# Altium PCB LEDbars.PcbDoc
Units mm, origin at the board's own origin, x right, y up, seen from the top; angles counter-clockwise.
Board outline 38.5 x 57.75 mm, 2 copper layers (Top Layer, Bottom Layer); 31 components, 51 nets, 146 pads, 18 vias.
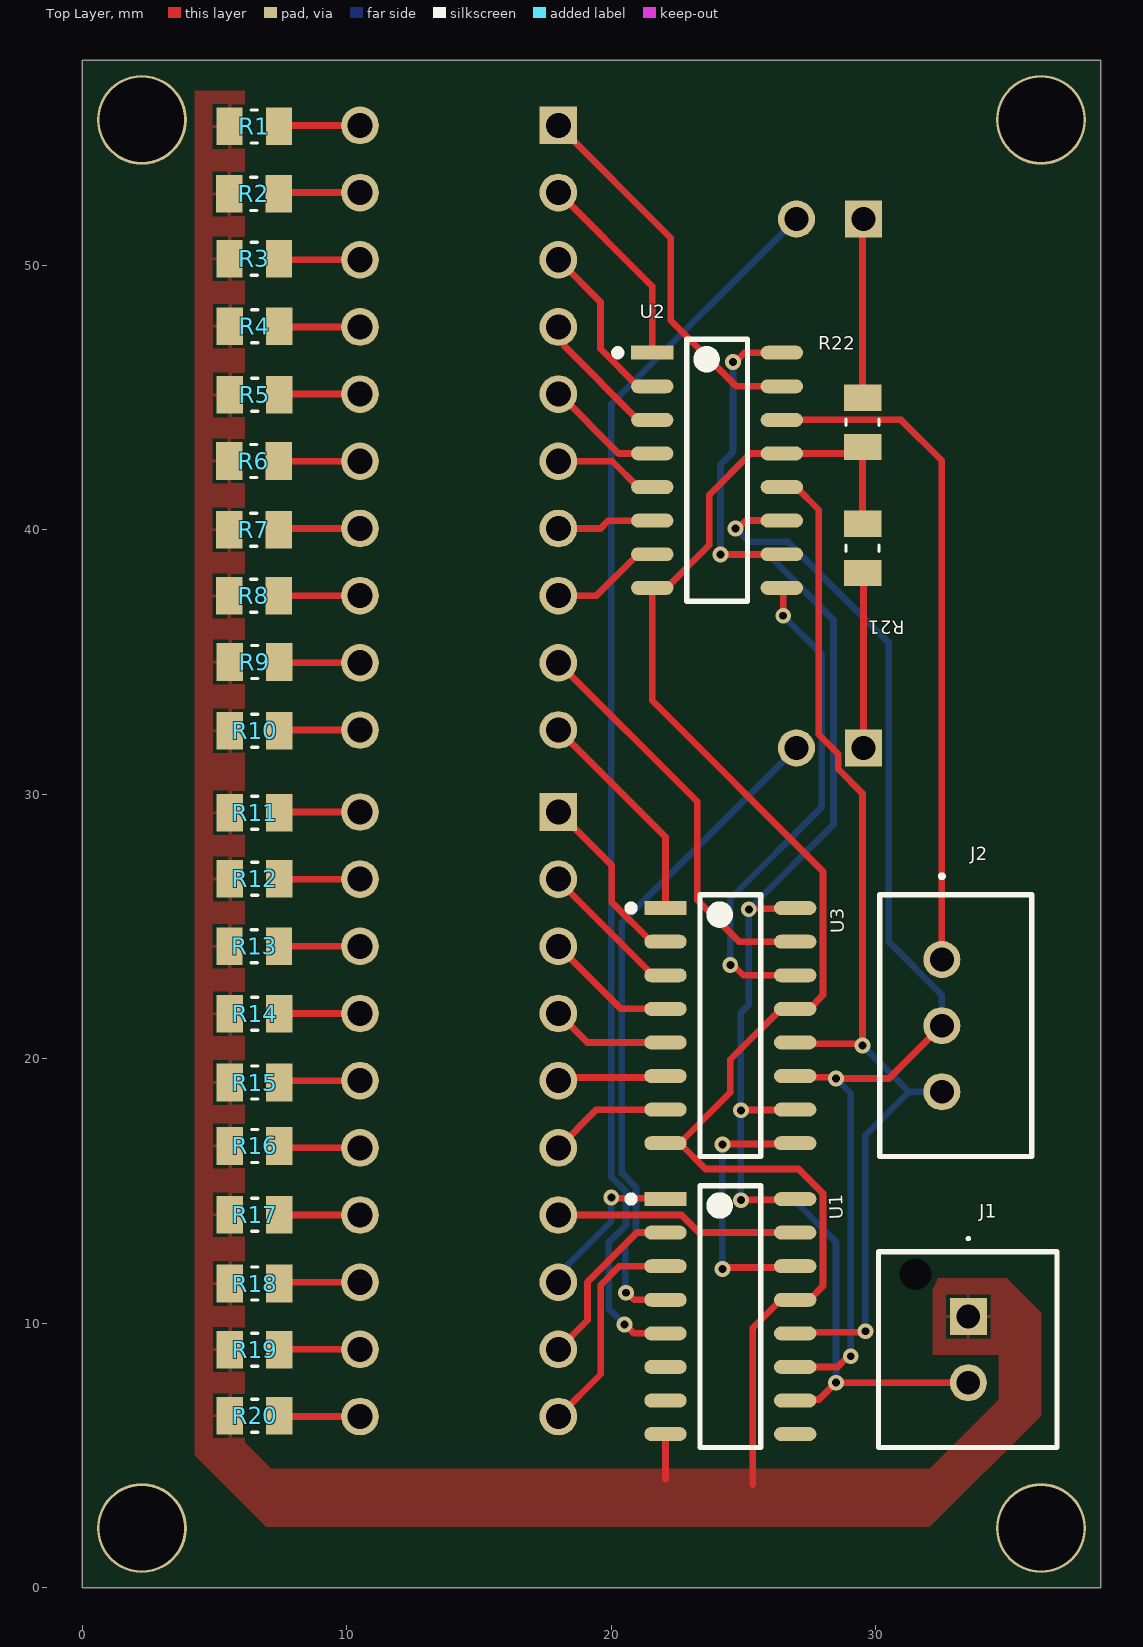
[diagram p0: Top Layer view]
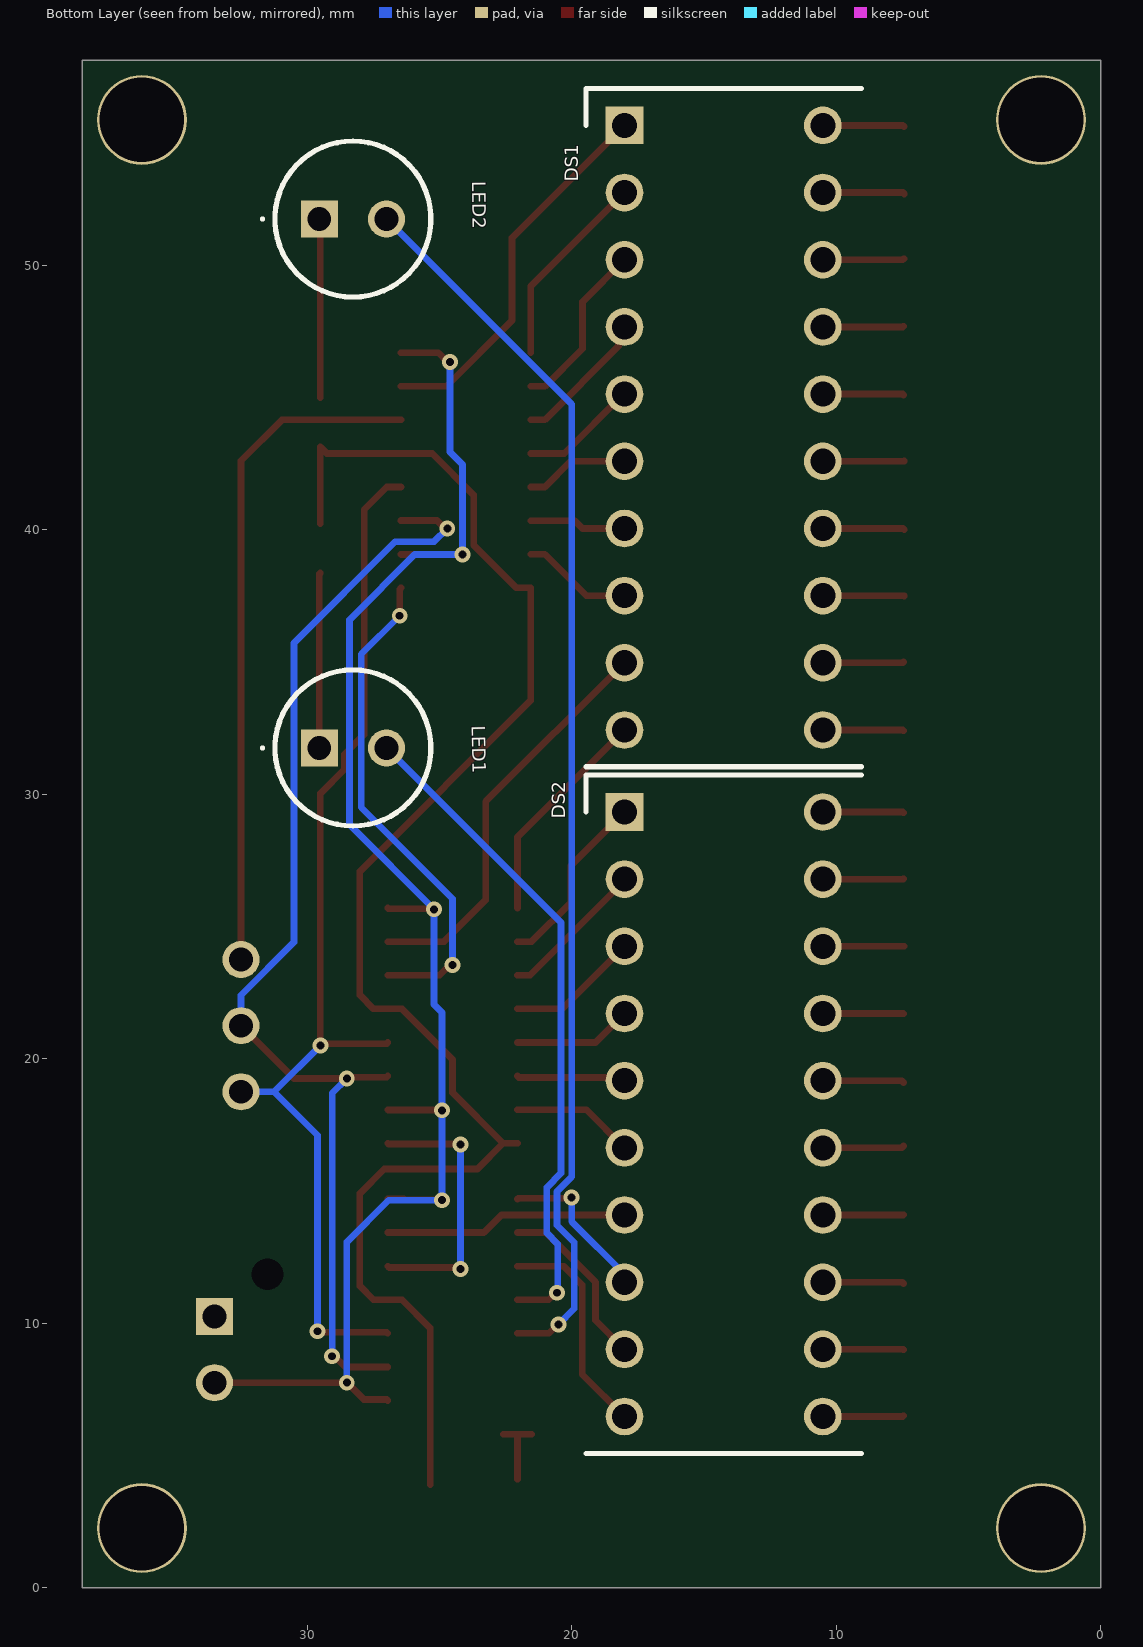
[diagram p1: Bottom Layer view, seen from below]
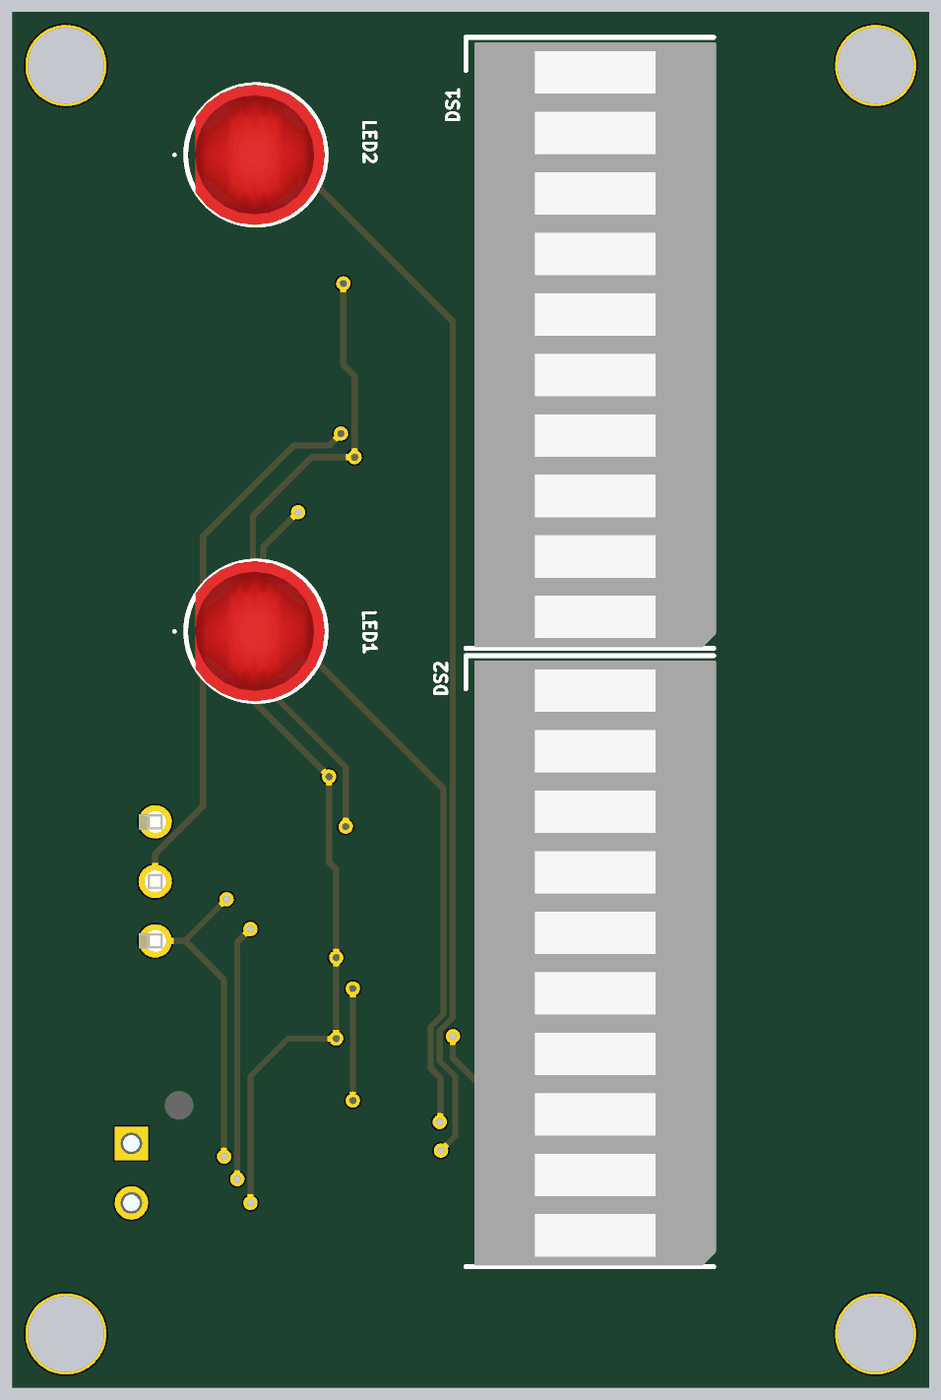
[diagram p2: 3D render of the assembled board from below, using the file's embedded part models]

## Layer stack, top to bottom
Top Solder: solder mask 0.0102, Solder Resist, Dk 3.5
Top Layer: signal copper 0.0356
Dielectric 1: dielectric 0.32, FR-4, Dk 4.8
Bottom Layer: signal copper 0.0356
Bottom Solder: solder mask 0.0102, Solder Resist, Dk 3.5

## Board outline
0,0 0,57.75 38.5,57.75 38.5,0

## Design rules (kind name [scope] priority, off if disabled: settings)
BoardOutlineClearance [All] p1: gap=0.2 ignorepadtopadclearanceinfootprint=FALSE
Clearance [All] p1: gap=0.127 ignorepadtopadclearanceinfootprint=FALSE except(0.25: Arc-Hole Track-Hole SMDPad-Hole THPad-Hole Via-Hole Fill-Hole Poly-Hole Region-Hole Text-Hole)
ComponentClearance [All] p1: gap=0.127 collisioncheckmode=3 verticalgap=0.127 showdistances=TRUE
DiffPairsRouting [All] p1: maxlimit=0.254 minlimit=0.127 mostfreqgap=0.127 toplayer_minwidth=0.127 toplayer_maxwidth=25.4 toplayer_prefwidth=0.127 bottomlayer_minwidth=0.127 bottomlayer_maxwidth=25.4 bottomlayer_prefwidth=0.127 maxuncoupledlength=12.7
Height [All] p1: minheight=0 maxheight=1816.048 prefheight=12.7
HoleSize [All] p1: absolutevalues=TRUE maxlimit=6.3 minlimit=0.3 maxpercent=80.000 minpercent=20.000
HoleToHoleClearance [All] p1: gap=0.25 allowstackedmicrovias=FALSE
MinimumAnnularRing [All] p1: minimumring=0.076
MinimumSolderMaskSliver [All] p1: minsoldermaskwidth=0
PlaneClearance [All] p1: clearance=0.127
PlaneConnect PlaneConnectPowerPads [InPadClass('PowerPads')] p1: planeconnectstyle=Direct reliefexpansion=0.508 reliefentries=4 reliefconductorwidth=0.254 reliefairgap=0.254
PlaneConnect [All] p2: pad.planeconnectstyle=Relief pad.reliefexpansion=0.3 pad.reliefentries=4 pad.reliefconductorwidth=0.127 pad.reliefairgap=0.127 via.planeconnectstyle=Direct via.reliefexpansion=0.3 via.reliefentries=4 via.reliefconductorwidth=0.127 via.reliefairgap=0.127
PolygonConnect PolygonConnectPowerPads [All vs (InPadClass('PowerPads'))] p1: connectstyle=Direct reliefconductorwidth=0.254 reliefentries=4 polygonreliefangle="90 Angle" airgapwidth=0.254
PolygonConnect [All] p2: thpad.connectstyle=Relief thpad.reliefconductorwidth=0.127 thpad.reliefentries=4 thpad.polygonreliefangle="90 Angle" thpad.airgapwidth=0.127 smdpad.connectstyle=Relief smdpad.reliefconductorwidth=0.127 smdpad.reliefentries=4 smdpad.polygonreliefangle="90 Angle" smdpad.airgapwidth=0.127 via.connectstyle=Direct via.reliefconductorwidth=0.127 via.reliefentries=4 via.polygonreliefangle="90 Angle" via.airgapwidth=0.127
RoutingVias [All] p1: holewidth=0.3 width=0.6 viastyle="Through Hole" minholewidth=0.3 minwidth=0.6 maxholewidth=0.6 maxwidth=6.6
SilkToSilkClearance [All] p1: silktosilkclearance=0
SilkToSolderMaskClearance [IsPad] p1: minsilkscreentomaskgap=0.127 clearancetoexposedcopper=TRUE
SolderMaskExpansion [All] p1: expansion=0.075 istentingtop=FALSE
SupplyNets "Schematic Supply Nets_1" [InNet('+5')] p1: voltage=0.000
SupplyNets "Schematic Supply Nets" [InNet('GND')] p2: voltage=0.000
Width [All] p1: maxlimit=25.4 minlimit=0.127 preferedwidth=0.127 minimp=50.000000 maximp=50.000000 favimp=50.000000
20 further rules are at their usual default settings.

## Components (designator, comment, footprint, x,y, rotation, side; value= is the part's Value field where it differs from the comment)
DS1 "DC10GWA" DIPS750W75P254L2540H825Q20N 18,55.29 r180 bottom
DS2 "DC10GWA" DIPS750W75P254L2540H825Q20N 18,29.33 r180 bottom
J1 "BH2B-XH-2_LF__SN_" BH2BXH2LFSN 33.5,10.25 r90 top
J2 "B3B-XH-A_LF__SN_" B3BXHALFSN 32.5,23.75 r270 top
LED1 "WP7113ID5V" WP7113ID5V 29.54,31.75 r90 bottom
LED2 "WP7113ID5V" WP7113ID5V 29.54,51.75 r90 bottom
R1 "0805W8F3300T5E" RESC2012X65N 6.5,55.25 r180 top value=330
R2 "0805W8F3300T5E" RESC2012X65N 6.485,52.7 r180 top value=330
R3 "0805W8F3300T5E" RESC2012X65N 6.5,50.25 r180 top value=330
R4 "0805W8F3300T5E" RESC2012X65N 6.515,47.7 r180 top value=330
R5 "0805W8F3300T5E" RESC2012X65N 6.515,45.1 r180 top value=330
R6 "0805W8F3300T5E" RESC2012X65N 6.485,42.6 r180 top value=330
R7 "0805W8F3300T5E" RESC2012X65N 6.485,40 r180 top value=330
R8 "0805W8F3300T5E" RESC2012X65N 6.485,37.5 r180 top value=330
R9 "0805W8F3300T5E" RESC2012X65N 6.515,35 r180 top value=330
R10 "0805W8F3300T5E" RESC2012X65N 6.515,32.4 r180 top value=330
R11 "0805W8F3300T5E" RESC2012X65N 6.515,29.3 r180 top value=330
R12 "0805W8F3300T5E" RESC2012X65N 6.515,26.8 r180 top value=330
R13 "0805W8F3300T5E" RESC2012X65N 6.5,24.25 r180 top value=330
R14 "0805W8F3300T5E" RESC2012X65N 6.515,21.7 r180 top value=330
R15 "0805W8F3300T5E" RESC2012X65N 6.515,19.1 r180 top value=330
R16 "0805W8F3300T5E" RESC2012X65N 6.515,16.7 r180 top value=330
R17 "0805W8F3300T5E" RESC2012X65N 6.515,14.1 r180 top value=330
R18 "0805W8F3300T5E" RESC2012X65N 6.515,11.5 r180 top value=330
R19 "0805W8F3300T5E" RESC2012X65N 6.515,9 r180 top value=330
R20 "0805W8F3300T5E" RESC2012X65N 6.515,6.5 r180 top value=330
R21 "0805W8F3300T5E" RESC2012X65N 29.5,39.3 r90 top value=330
R22 "0805W8F3300T5E" RESC2012X65N 29.5,44.065 r270 top value=330
U1 "74HC595D,118" FP-SOT109-1-IPC_C 24.5,10.25 r0 top
U2 "74HC595D,118" FP-SOT109-1-IPC_C 24,42.25 r0 top
U3 "74HC595D,118" FP-SOT109-1-IPC_C 24.5,21.25 r0 top

## Footprints (in the part's own frame and the unit in brackets; to place one, negate y for a bottom-side part, rotate by r counter-clockwise, add the part's x,y. Pads: shape width x height; smd on the part's side, far side on the other; paste and mask are expansions set on the pad)
B3BXHALFSN [mm]
  round 1.4 hole 0.9: 1(0,0) 2(2.5,0) 3(5,0)
  silkscreen extent -3.2,-2.35 7.45,3.4, body extent -2.45,-2.35 7.45,3.4, height 7.09
BH2BXH2LFSN [mm]
  rect 1.4x1.4 hole 0.9: 1(0,0)
  round 1.4 hole 0.9: 2(-2.5,0)
  round 0.6 hole 1.2 unplated: MH1(1.6,2)
  silkscreen extent -4.95,-3.35 3,3.4, body extent -4.95,-3.35 2.45,3.4, height 14.3
DIPS750W75P254L2540H825Q20N [mm]
  rect 1.425x1.425 hole 0.95: 1(0,0)
  round 1.425 hole 0.95: 2(0,-2.54) 3(0,-5.08) 4(0,-7.62) 5(0,-10.16) 6(0,-12.7) 7(0,-15.24) 8(0,-17.78) 9(0,-20.32) 10(0,-22.86) 11(7.5,-22.86) 12(7.5,-20.32) 13(7.5,-17.78) 14(7.5,-15.24) 15(7.5,-12.7) 16(7.5,-10.16) 17(7.5,-7.62) 18(7.5,-5.08) 19(7.5,-2.54) 20(7.5,0)
  silkscreen extent -1.46,-24.25 8.95,1.39, body extent -1.1,-24.21 9.06,1.19, height 6.29
FP-SOT109-1-IPC_C [mm]
  rect 1.604x0.528 smd paste+0 mask+0: 1(-2.451,4.445)
  rrect100% 1.604x0.528 smd paste+0 mask+0: 2(-2.451,3.175) 3(-2.451,1.905) 4(-2.451,0.635) 5(-2.451,-0.635) 6(-2.451,-1.905) 7(-2.451,-3.175) 8(-2.451,-4.445) 9(2.451,-4.445) 10(2.451,-3.175) 11(2.451,-1.905) 12(2.451,-0.635) 13(2.451,0.635) 14(2.451,1.905) 15(2.451,3.175) 16(2.451,4.445)
  silkscreen extent -3.88,-4.95 1.15,4.95, body extent -3.35,-5.05 3.35,5.05, height 0.25
RESC2012X65N [mm]
  rect 1x1.42 smd: 1(-0.935,0) 2(0.935,0)
  silkscreen extent -0.12,-0.63 0.12,0.63
WP7113ID5V [mm]
  rect 1.4x1.4 hole 0.9: 1(0,0)
  round 1.4 hole 0.9: 2(0,-2.54)
  silkscreen extent -2.95,-4.22 2.95,2.2, body extent -2.95,-4.15 2.95,1.28, height 15.17

## Part data
DS1 DS2: "Display", Manufacturer_Name=Kingbright, Mouser Part Number=604-DC10GWA, Datasheet Link=http://www.us.kingbright.com/images/catalog/SPEC/DC10GWA.pdf, Height=8.25mm, Manufacturer_Part_Number=DC10GWA, Mouser Price/Stock=https://www.mouser.co.uk/ProductDetail/Kingbright/DC10GWA?qs=E09Sz5t5voWFSEBebdyzXA%3D%3D
J1: "Connector", Arrow Part Number=BH2B-XH-2(LF)(SN), Manufacturer_Name="JST (JAPAN SOLDERLESS TERMINALS)", Arrow Price/Stock=https://www.arrow.com/en/products/bh2b-xh-2-lf-sn/jst-manufacturing?region=europe, Datasheet Link=https://www.jst-mfg.com/product/pdf/eng/eXH-H.pdf, Height=14.2mm, Manufacturer_Part_Number=BH2B-XH-2(LF)(SN)
J2: "Connector", Arrow Part Number=B3B-XH-A(LF)(SN), Manufacturer_Name="JST (JAPAN SOLDERLESS TERMINALS)", Mouser Part Number=306-B3BXHALFSNP, Arrow Price/Stock=https://www.arrow.com/en/products/b3b-xh-a-lf-sn/jst-manufacturing?utm_currency=USD&region=europe, Datasheet Link=https://datasheet.lcsc.com/szlcsc/1812131720_JST-Sales-America-B3B-XH-A-LF-SN_C144394.pdf, Height=7mm, Manufacturer_Part_Number=B3B-XH-A(LF)(SN), Mouser Price/Stock=https://www.mouser.co.uk/ProductDetail/JST-Commercial/B3B-XH-ALFSN?qs=cdbOS8ANM9BVkoboCCIEMQ%3D%3D
LED1 LED2: "LED", Manufacturer_Name=Kingbright, Mouser Part Number=604-WP7113ID5V, Arrow Part Number=WP7113ID5V, Arrow Price/Stock=https://www.arrow.com/en/products/wp7113id5v/kingbright?utm_currency=USD&region=nac, Datasheet Link=https://www.kingbrightusa.com/images/catalog/SPEC/WP7113ID5V.pdf, Height=9.85mm, Manufacturer_Part_Number=WP7113ID5V, Mouser Price/Stock=https://www.mouser.co.uk/ProductDetail/Kingbright/WP7113ID5V?qs=58z0TXQGVSQgkIxR0kd%2F5Q%3D%3D
R1 R2 R3 R4 R5 R6 R7 R8 R9 R10 R11 R12 R13 R14 R15 R16 R17 R18 R19 R20 R21 R22: library part CMP-009-00179-1, "330 Ohm 1/8W Thick Film Resistor 0805 Chip - Surface Mount", Case/Package=None, Check_prices=https://www.snapeda.com/parts/0805W8F3300T5E/Uni-Royal/view-part/?ref=eda, Component Type=Standard, Design Item ID=0805W8F3300T5E, MF=Uni-Royal, MP=0805W8F3300T5E, Pins=2, SnapEDA_Link=https://www.snapeda.com/parts/0805W8F3300T5E/Uni-Royal/view-part/?ref=snap, Source=0805W8F3300T5E.SchLib
U1 U2 U3: library part CMP-14351-000006-1, "IC SHIFT REGISTER 8BIT 16SOIC", RoHS Compliant=Yes

## Free pads (board coordinates)
  round 3.4 hole 3.2: 6(36.25,2.25) 7(2.25,2.25) 8(36.25,55.5) 9(2.25,55.5)

## Via types
v1: diameter 0.6, hole 0.3, Top Layer to Bottom Layer, 18 vias

## Nets (pads, with @x,y where several pads share a name; then routed paths per layer and width w, separated by ;. In a path a pad name is that pad's centre, name@x,y a point inside that pad or via, vN(x,y) a via of type N, cw(c..) or ccw(c..) an arc to the next point about the centre after c; other vN are vias at no path point)
+5: J1.2 U1.10 U1.16 U2.10 U2.16 U3.10 U3.16 | length 62.8
  Top Layer w0.254: v1(24.126,39.063) 24.132,39.069 26.445,39.069 U2.10 ; v1(24.6,46.35) 24.694,46.35 25.039,46.695 U2.16 ; v1(24.9,14.65) 24.922,14.672 26.316,14.672 26.339,14.695 U1.16 ; v1(24.9,18.05) 24.913,18.063 26.938,18.063 U3.10 ; v1(25.2,25.65) 25.223,25.673 26.928,25.673 U3.16 ; U1.10 26.988,7.112 27.856,7.112 28.494,7.75 v1(28.5,7.75) J1.2
  Bottom Layer w0.254: v1(24.126,39.063) 24.126,42.469 24.6,42.943 v1(24.6,46.35) ; v1@24.126,39.15 24.213,39.063 25.934,39.063 28.4,36.596 28.4,28.85 v1(25.2,25.65) 25.2,22.05 24.9,21.75 v1(24.9,18.05) v1(24.9,14.65) 26.919,14.65 28.5,13.069 v1(28.5,7.75)
GND: J1.1 R1.2 R2.2 R3.2 R4.2 R5.2 R6.2 R7.2 R8.2 R9.2 R10.2 R11.2 R12.2 R13.2 R14.2 R15.2 R16.2 R17.2 R18.2 R19.2 R20.2 R21.2 R22.2 U1.8 U1.13 U2.8 U2.13 U3.8 U3.13 | length 63
  Top Layer w0.254: U1.8@21.511,5.805 U1.8 ; U1.8@22,5.756 U1.8 ; 22.049,4.101 U1.8 ; U3.8 U3.8@22.587,16.805 ; U1.8@22.587,5.805 U1.8 ; 25.35,3.9 25.35,9.822 26.413,10.885 U1.13 27.489,10.885 28.007,11.403 28.007,14.91 27.086,15.831 23.561,15.831 U3.8@22.587,16.805 ; R21.2 R22.2 29.255,42.885 U2.13 25.268,42.885 23.704,41.321 23.704,39.421 22.087,37.805 U2.8 21.549,33.538 28.007,27.08 28.007,22.403 27.489,21.885 U3.13 26.413,21.885 24.5,19.972 24.5,18.718 U3.8@22.587,16.805
MCU_Clock: J2.2 U1.11 U2.11 U3.11 | length 44.2
  Top Layer w0.254: v1(24.7,40.05) 24.794,40.05 25.091,40.348 26.448,40.348 U2.11 ; U3.11 26.998,19.298 28.452,19.298 v1(28.5,19.25) 30.5,19.25 J2.2 ; U1.11 28.555,8.345 28.96,8.75 v1(29.054,8.75)
  Bottom Layer w0.254: v1(24.7,40.05) 25.2,39.55 26.667,39.55 30.494,35.723 30.494,24.407 32.5,22.401 J2.2 ; v1(28.5,19.25) 29.054,18.696 v1(29.054,8.75)
MCU_Data: J2.1 U2.14 | length 25.5
  Top Layer w0.254: U2.14 30.954,44.155 32.5,42.609 J2.1
MCU_Latch: J2.3 U1.12 U2.12 U3.12 | length 41.4
  Top Layer w0.254: U2.12 26.989,41.615 27.846,40.758 27.846,32.253 28.586,31.513 28.586,30.945 29.5,30.031 v1(29.5,20.5) 29.437,20.563 27.003,20.563 U3.12 ; U1.12 26.991,9.655 29.567,9.655 v1(29.608,9.696)
  Bottom Layer w0.254: v1(29.5,20.5) 31.25,18.75 ; v1(29.608,9.696) 29.608,17.108 31.25,18.75 ; J2.3 31.25,18.75
NetDS1_11: DS1.11 R10.1 | length 3.1
  Top Layer w0.254: R10.1 7.48,32.43 DS1.11
NetDS1_12: DS1.12 R9.1 | length 3.1
  Top Layer w0.254: R9.1 7.48,34.97 DS1.12
NetDS1_13: DS1.13 R8.1 | length 3.1
  Top Layer w0.254: R8.1 7.43,37.51 DS1.13
NetDS1_14: DS1.14 R7.1 | length 3.1
  Top Layer w0.254: R7.1 7.47,40.05 DS1.14
NetDS1_15: DS1.15 R6.1 | length 3.4
  Top Layer w0.254: R6.1 7.43,42.59 DS1.15 DS1.15@10.183,42.59
NetDS1_16: DS1.16 R5.1 | length 3.1
  Top Layer w0.254: R5.1 7.48,45.13 DS1.16
NetDS1_17: DS1.17 R4.1 | length 3.3
  Top Layer w0.254: R4.1 7.48,47.67 DS1.17 DS1.17@10.294,47.67
NetDS1_18: DS1.18 R3.1 | length 3.1
  Top Layer w0.254: R3.1 7.475,50.21 DS1.18
NetDS1_19: DS1.19 R2.1 | length 3.1
  Top Layer w0.254: R2.1 7.47,52.75 DS1.19
NetDS1_20: DS1.20 R1.1 | length 3.1
  Top Layer w0.254: R1.1 7.475,55.29 DS1.20
NetDS2_11: DS2.11 R20.1 | length 3.1
  Top Layer w0.254: R20.1 7.48,6.47 DS2.11
NetDS2_12: DS2.12 R19.1 | length 3.1
  Top Layer w0.254: R19.1 7.46,9.01 DS2.12
NetDS2_13: DS2.13 R18.1 | length 3.1
  Top Layer w0.254: R18.1 7.5,11.55 DS2.13
NetDS2_14: DS2.14 R17.1 | length 3.1
  Top Layer w0.254: R17.1 7.46,14.09 DS2.14
NetDS2_15: DS2.15 R16.1 | length 3.1
  Top Layer w0.254: R16.1 7.52,16.63 DS2.15
NetDS2_16: DS2.16 R15.1 | length 3.1
  Top Layer w0.254: R15.1 7.52,19.17 DS2.16
NetDS2_17: DS2.17 R14.1 | length 3.1
  Top Layer w0.254: R14.1 7.46,21.71 DS2.17
NetDS2_18: DS2.18 R13.1 | length 3.1
  Top Layer w0.254: R13.1 DS2.18
NetDS2_19: DS2.19 R12.1 | length 3.1
  Top Layer w0.254: R12.1 7.46,26.79 DS2.19
NetDS2_20: DS2.20 R11.1 | length 3.1
  Top Layer w0.254: R11.1 7.48,29.33 DS2.20
NetLED1_1: LED1.1 R21.1 | length 6.6
  Top Layer w0.254: R21.1 29.54,38.325 LED1.1
NetLED2_1: LED2.1 R22.1 | length 6.8
  Top Layer w0.254: R22.1 29.5,51.71 LED2.1
NetU1_14: U1.14 U3.9 | length 10.3
  Top Layer w0.254: v1(24.2,12.05) 24.253,12.103 26.898,12.103 U1.14 ; v1(24.2,16.75) 24.228,16.778 26.923,16.778 U3.9
  Bottom Layer w0.254: v1(24.2,12.05) v1(24.2,16.75)
NetU2_9: U2.9 U3.14 | length 18.9
  Top Layer w0.254: v1(24.5,23.55) 24.594,23.55 24.989,23.155 U3.14 ; U2.9 26.5,37.756 v1(26.5,36.75)
  Bottom Layer w0.254: v1(24.5,23.55) 24.5,26.05 27.954,29.504 27.954,35.296 v1(26.5,36.75)
sr1_1: DS1.1 U2.15 | length 14.4
  Top Layer w0.254: DS1.1 22.25,51.04 22.25,47.917 24.742,45.425 U2.15
sr1_2: DS1.2 U2.1 | length 7.5
  Top Layer w0.254: DS1.2 21.549,49.201 U2.1
sr1_3: DS1.3 U2.2 | length 6.6
  Top Layer w0.254: DS1.3 19.591,48.619 19.591,46.845 21.011,45.425 U2.2
sr1_4: DS1.4 U2.3 | length 5.3
  Top Layer w0.254: DS1.4 18.224,47.446 18.224,46.942 21.011,44.155 U2.3
sr1_5: DS1.5 U2.4 | length 4.5
  Top Layer w0.254: DS1.5 18.035,45.13 20.28,42.885 U2.4
sr1_6: DS1.6 U2.5 | length 4
  Top Layer w0.254: DS1.6 20.036,42.59 21.011,41.615 U2.5
sr1_7: DS1.7 U2.6 | length 3.7
  Top Layer w0.254: DS1.7 19.591,40.05 19.886,40.345 U2.6
sr1_8: DS1.8 U2.7 | length 4.2
  Top Layer w0.254: DS1.8 19.446,37.51 21.011,39.075 U2.7
sr2_1: DS1.9 U3.15 | length 15.5
  Top Layer w0.254: DS1.9 23.25,29.72 23.25,26 24.825,24.425 U3.15
sr2_2: DS1.10 U3.1 | length 8.4
  Top Layer w0.254: DS1.10 22.049,28.381 U3.1
sr2_3: DS2.1 U3.2 | length 6.9
  Top Layer w0.254: DS2.1 20.022,27.308 20.022,25.914 21.511,24.425 U3.2
sr2_4: DS2.2 U3.3 | length 5.6
  Top Layer w0.254: DS2.2 18,26.728 21.573,23.155 U3.3
sr2_5: DS2.3 U3.4 | length 5
  Top Layer w0.254: DS2.3 20.365,21.885 U3.4
sr2_6: DS2.4 U3.5 | length 4.5
  Top Layer w0.254: DS2.4 19.095,20.615 U3.5
sr2_7: DS2.5 U3.6 | length 4.1
  Top Layer w0.254: DS2.5 18.123,19.293 21.997,19.293 U3.6
sr2_8: DS2.6 U3.7 | length 4.6
  Top Layer w0.254: DS2.6 19.445,18.075 U3.7
sr3_1: DS2.7 U1.15 | length 9.2
  Top Layer w0.254: DS2.7 22.655,14.09 23.32,13.425 U1.15
sr3_2: DS2.8 U1.1 | length 6.1
  Top Layer w0.254: v1(20,14.75) 20.028,14.722 22.022,14.722 U1.1
  Bottom Layer w0.254: DS2.8 18,11.85 20,13.85 v1(20,14.75)
sr3_3: DS2.9 U1.2 | length 6.7
  Top Layer w0.254: DS2.9 19.1,10.11 19.1,11.55 20.975,13.425 U1.2
sr3_4: DS2.10 U1.3 | length 8.4
  Top Layer w0.254: DS2.10 19.6,8.07 19.6,11.45 20.305,12.155 U1.3
sr3_5: LED1.2 U1.4 | length 25.3
  Top Layer w0.254: v1(20.554,11.15) 20.601,11.15 20.866,10.885 U1.4
  Bottom Layer w0.254: v1(20.554,11.15) 20.527,11.177 20.527,12.999 20.935,13.407 20.935,15.137 20.4,15.672 20.4,25.15 LED1.2
sr3_6: LED2.2 U1.5 | length 47.1
  Top Layer w0.254: v1(20.5,9.95) 20.531,9.95 20.866,9.615 U1.5
  Bottom Layer w0.254: v1(20.5,9.95) 19.9,10.55 19.9,13.05 20.554,13.704 20.554,14.979 20,15.533 20,44.75 LED2.2
pads on no net: J1.MH1 U1.6 U1.7 U1.9

## Polygon pours and split planes (outlines as drawn)
GND on Top Layer "GND_L01_P000" (solid, pour order 0): 4.25,56.6 6.15,56.6 6.15,5.5 7.15,4.5 32.05,4.5 34.65,7.1 34.65,8.8 32.15,8.8 32.15,11.7 34.95,11.7 36.25,10.4 36.25,6.5 32.05,2.3 6.95,2.3 4.25,5

## Silkscreen, mask and mechanical layers (free items; w line width, h text height)
Mechanical 1:
  the board outline again, w0.254